# Altium PCB RF-learn-command-1relay-220V.PcbDoc
Units mm, origin at the board's own origin, x right, y up, seen from the top; angles counter-clockwise.
Board outline 72 x 47 mm, 2 copper layers (Top Layer, Bottom Layer); 41 components, 30 nets, 119 pads, 72 vias.
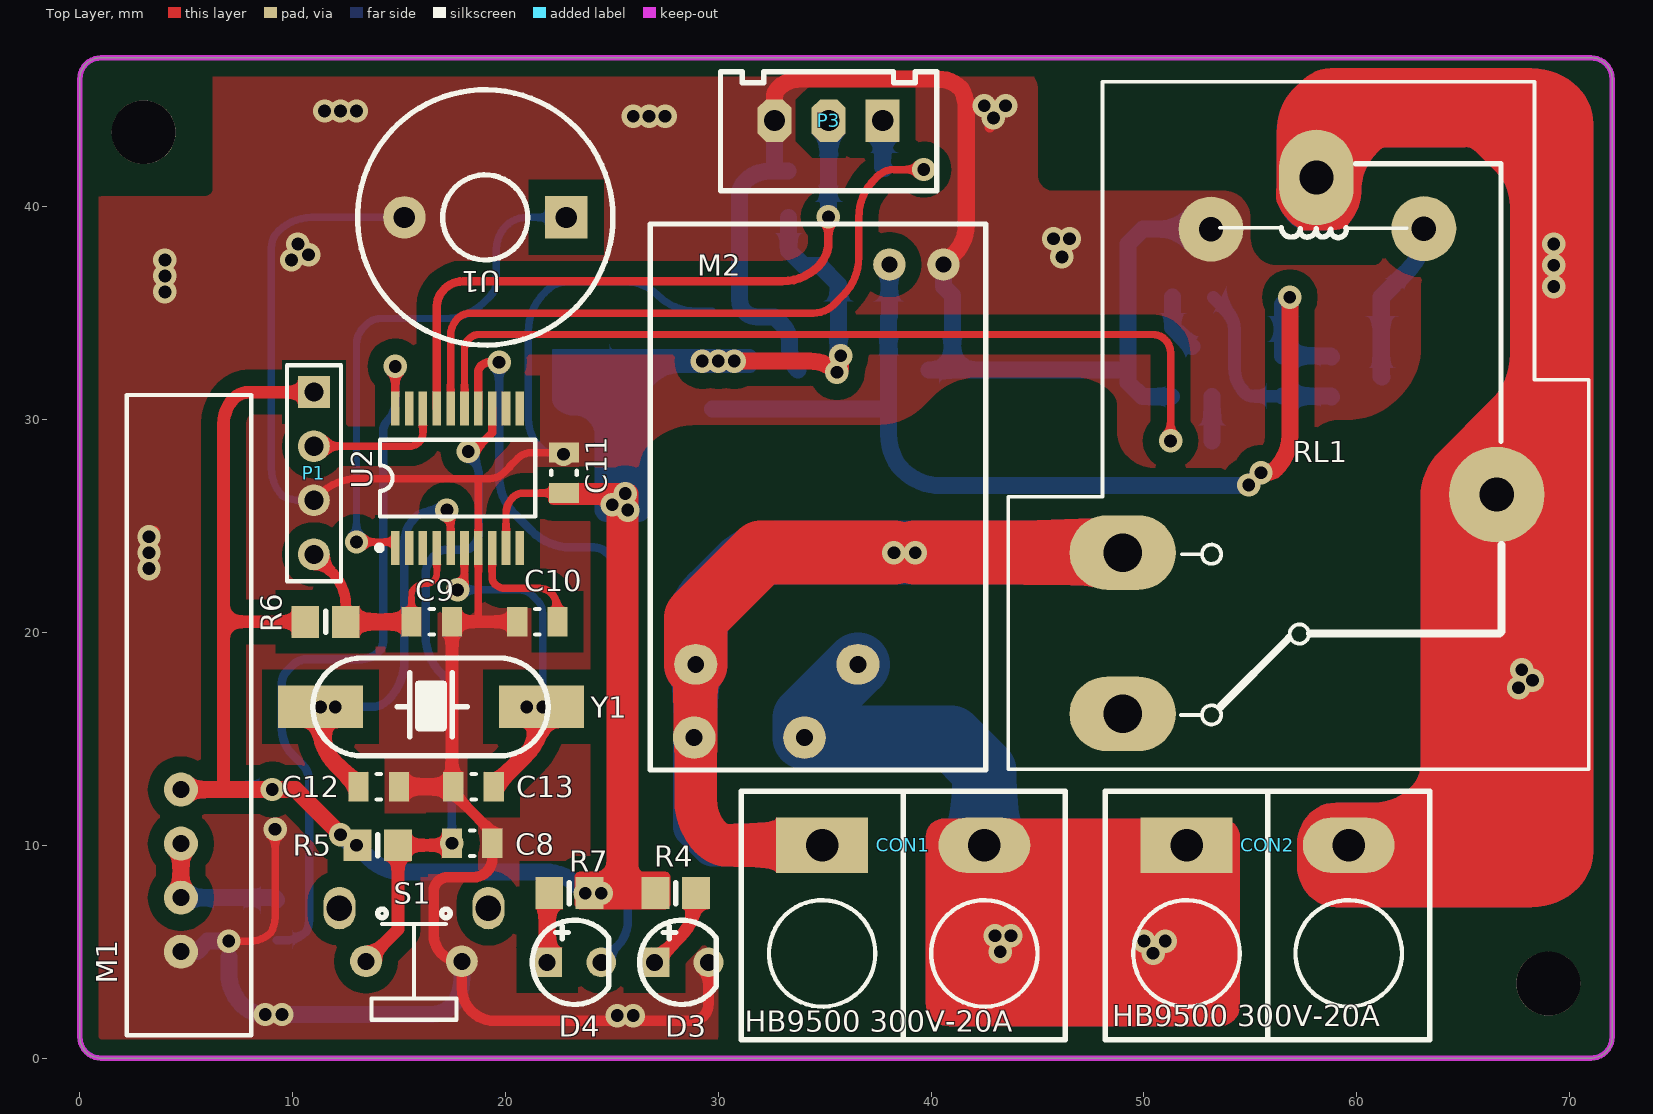
[diagram p0: Top Layer view]
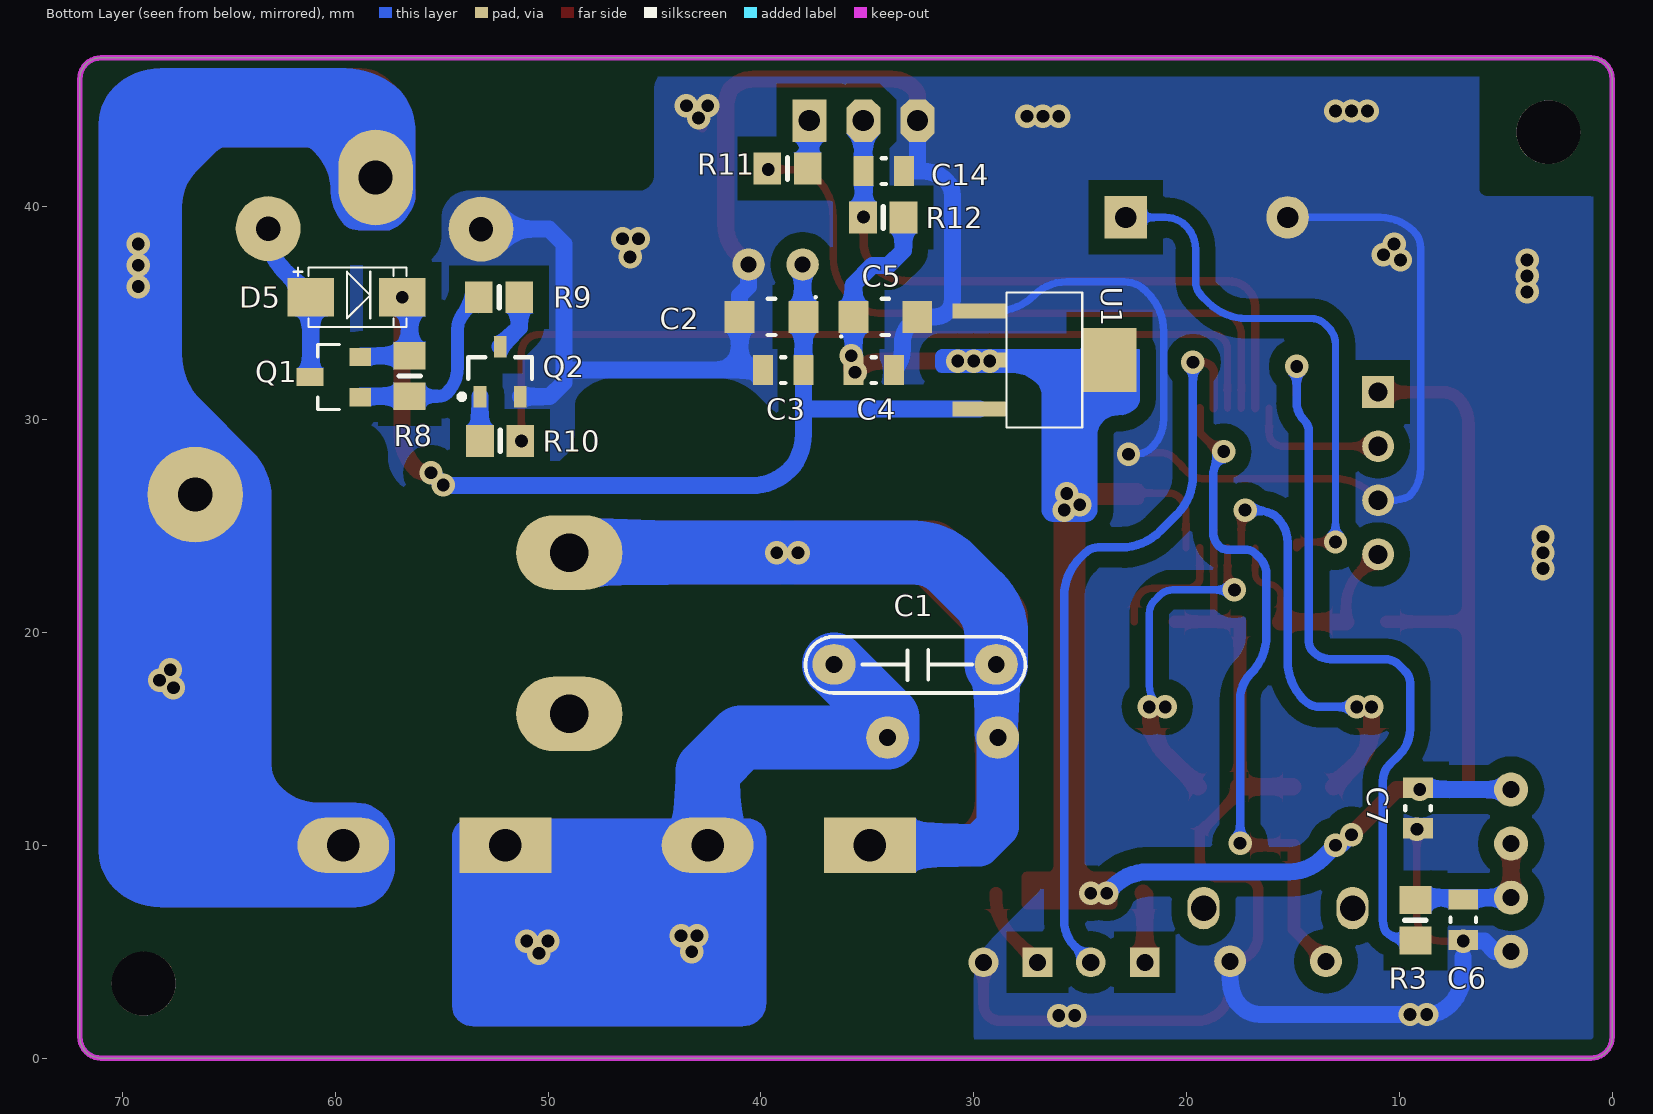
[diagram p1: Bottom Layer view, seen from below]
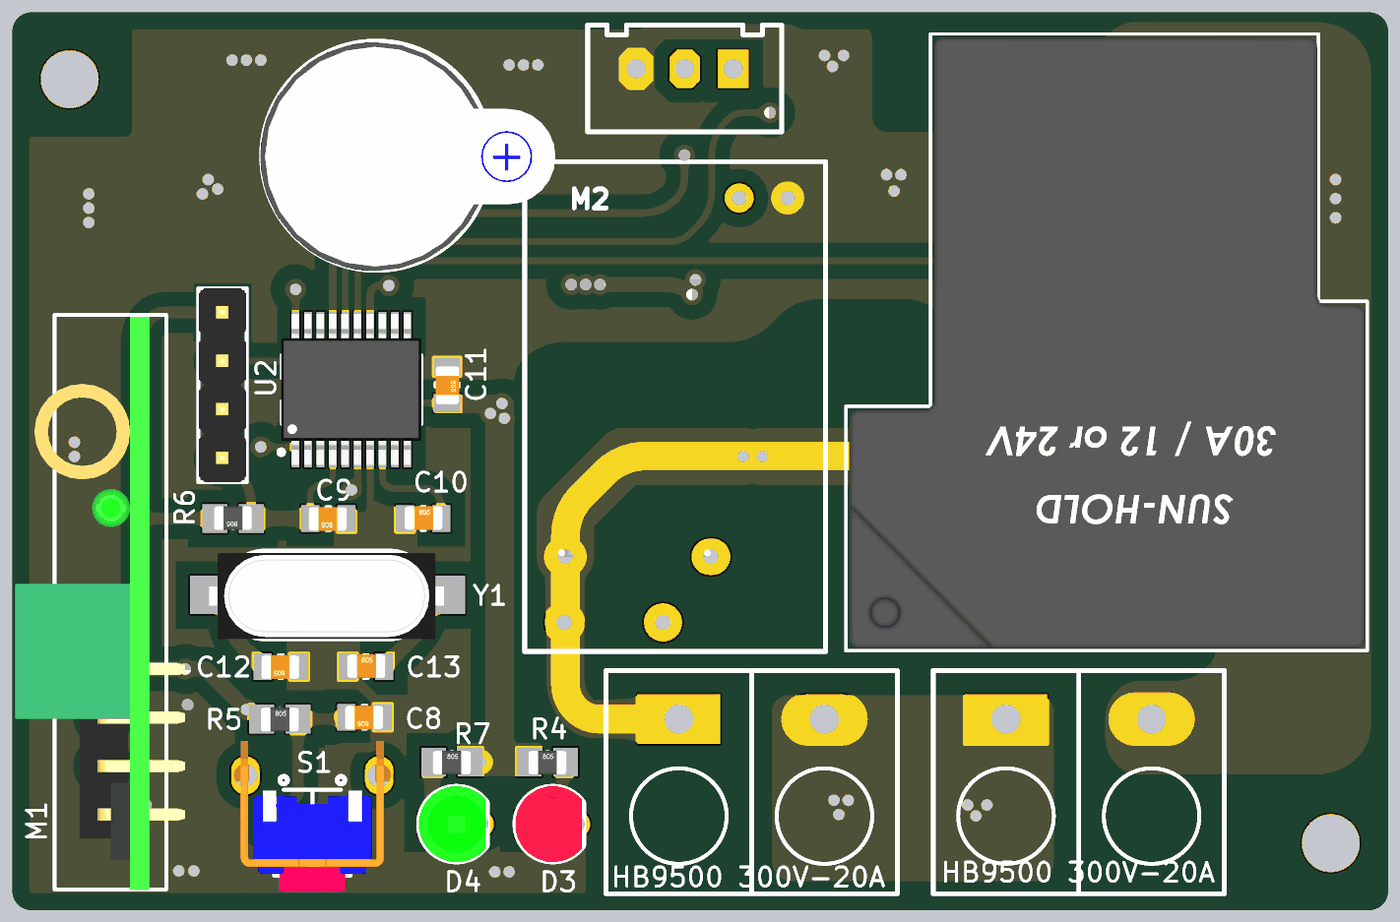
[diagram p2: 3D render of the assembled board from above, using the file's embedded part models]
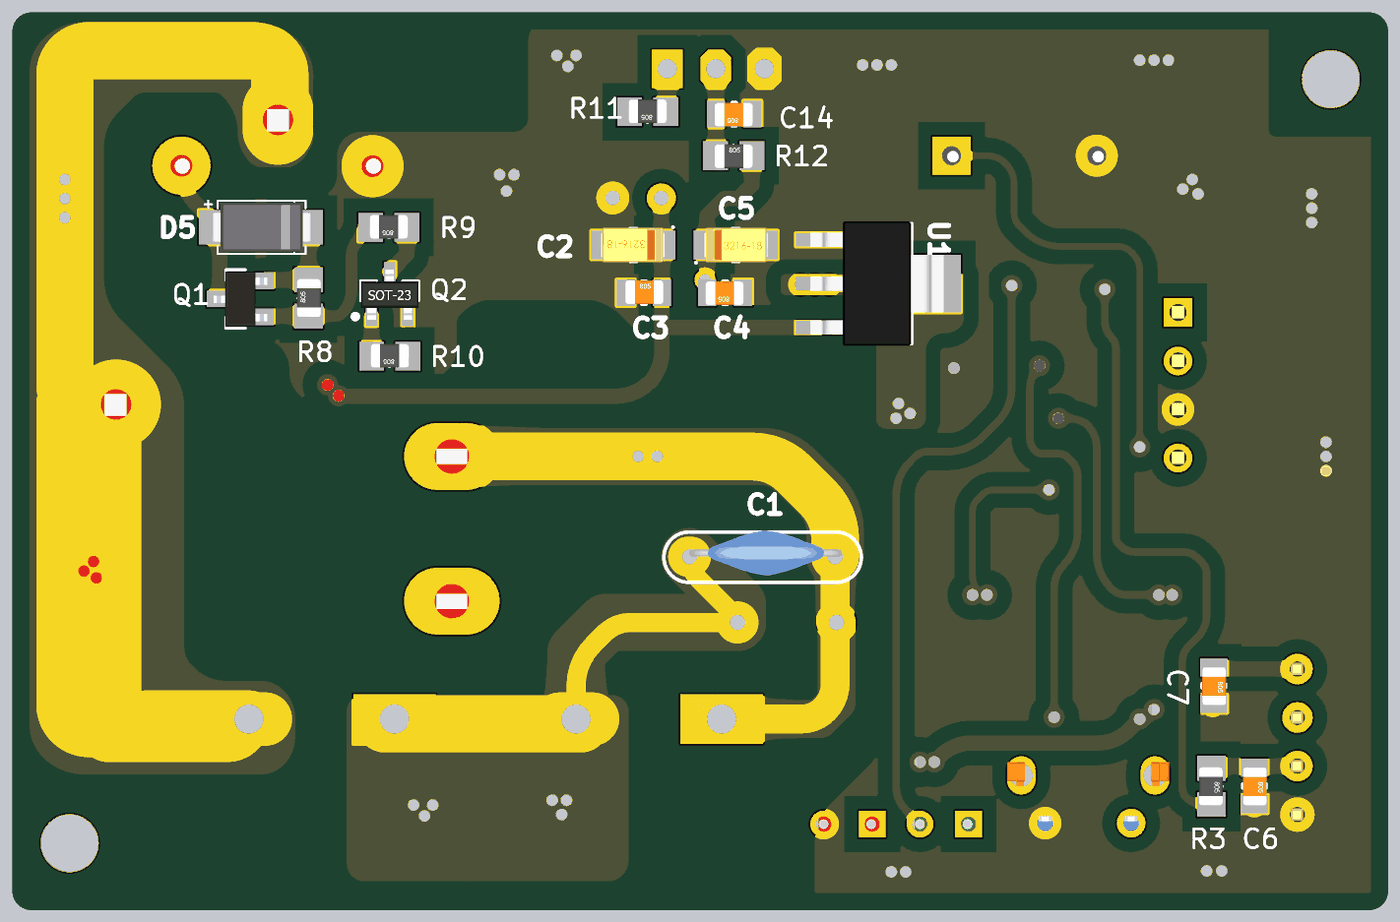
[diagram p3: 3D render of the assembled board from below, using the file's embedded part models]

## Layer stack, top to bottom
Top Solder: solder mask 0.0102, Solder Resist, Dk 3.5
Top Layer: signal copper 0.0356
Dielectric 1: dielectric 0.32, FR-4, Dk 4.8
Bottom Layer: signal copper 0.0356
Bottom Solder: solder mask 0.0102, Solder Resist, Dk 3.5

## Board outline
0,1 ccw(c1,1) 1,0 71,0 ccw(c71,1) 72,1 72,46 ccw(c71,46) 71,47 1,47 ccw(c1,46) 0,46

## Design rules (kind name [scope] priority, off if disabled: settings)
Clearance GND_L01_P001 [InPolygon] p1: gap=0.762
Clearance [All] p2: gap=0.2
PolygonConnect [All] p1: connectstyle=Direct reliefconductorwidth=0.254 reliefentries=4 polygonreliefangle="90 Angle" airgapwidth=0.254
RoomDefinition RF-learn-command-1relay-220V [InComponentClass('RF-learn-command-1relay-220V')] p1: confinementstyle=ConfineIn formatcopy=TRUE lockcomponents=FALSE outline 99,-32 375,-32 375,4 99,4
RoutingVias [All] p1: holewidth=0.6 width=1.1 viastyle="Through Hole" minholewidth=0.5 minwidth=1 maxholewidth=0.7 maxwidth=1.2
SolderMaskExpansion [All] p1: expansion=0.102
UnpouredPolygon [All] p1: allowshelved=TRUE
Width [All] p1: maxlimit=5 minlimit=0.254 preferedwidth=0.8
29 further rules are at their usual default settings.

## Components (designator, comment, footprint, x,y, rotation, side; value= is the part's Value field where it differs from the comment)
C1 "Cap1" C_Ceramic_KV 32.75,18.5 r180 bottom
C2 "10uF" "CAP TANTALUM 3216" 39.5,34.825 r0 bottom
C3 "100nF" "CM 0805" 38.95,32.325 r180 bottom
C4 "100nF" "CM 0805" 34.7,32.325 r0 bottom
C5 "10uF" "CAP TANTALUM 3216" 34.15,34.825 r180 bottom
C6 "33pF" "CM 0805" 7,6.5 r270 bottom
C7 "100n" "CM 0805" 9.127,11.75 r270 bottom
C8 "100nF" "CM 0805" 18.432,10.098 r180 top
C9 "100nF" "CM 0805" 16.537,20.5 r180 top
C10 "0.1uF" "CM 0805" 21.5,20.5 r0 top
C11 "100nF" "CM 0805" 22.75,27.5 r270 top
C12 "22p" "CM 0805" 14.05,12.75 r180 top
C13 "22p" "CM 0805" 18.5,12.75 r0 top
C14 "100nF" "CM 0805" 34.225,41.675 r0 bottom
CON1 "Terminal 2" domino-2pin-7.62 38.69,10 r0 top
CON2 "Terminal 2" domino-2pin-7.62 55.81,10 r0 top
D3 "RED LED" LED3mm-R 27,4.5 r0 top
D4 "RED LED" LED3mm-G 21.96,4.5 r0 top
D5 "SS14" "DO-214AC (SMA)" 60.25,36.25 r180 bottom
M1 "RF_315_RX" Module-RF-RX 4.75,12.62 r270 top
M2 "DRIVER_LED" LED_DRIVER12V 37.225,23.95 r90 top locked
P1 "Header 4" HDR1X4 11,31.29 r270 top
P3 "Header 3" HEADER_3_W 37.725,44.05 r180 top
Q1 "A1015" SC-43-BCE 60,32 r90 bottom
Q2 "C1815" 2SC1815 52.25,32.25 r90 bottom
R3 "4.7k" R0805 9.25,6.477 r270 bottom
R4 "1K" R0805 28,7.75 r0 top
R5 "10K" R0805 14,10 r0 top
R6 "10k" R0805 11.55,20.5 r180 top
R7 "1K" R0805 23,7.75 r0 top
R8 "4.7k" R0805 56.5,32.05 r90 bottom
R9 "4.7k" R0805 52.3,35.75 r0 bottom
R10 "2.2k" R0805 52.25,29 r0 bottom
R11 "1k" R0805 38.75,41.798 r0 bottom
R12 "10k" R0805 34.25,39.5 r180 bottom
RL1 "Relay SPDT, 10A, 12V" RL-SLA-24/12VDC-SL-C 58.1,41.375 r270 top locked
S1 "SW-SMD" "Button Tactile Switch" 15.7,5.8 r0 top
U1 "LM1117-3.3V" LM1117-SOP 28.455,32.8 r270 bottom
U1 "Buzzer" Buzzer 19.05,39.5 r180 top
U2 "STM8S003F3P6TR" SSOP-20 17.75,27.25 r0 top
Y1 "8MHz" HC49/US-SMD 16.5,16.5 r0 top

## Footprints (in the part's own frame and the unit in brackets; to place one, negate y for a bottom-side part, rotate by r counter-clockwise, add the part's x,y. Pads: shape width x height; smd on the part's side, far side on the other; paste and mask are expansions set on the pad)
2SC1815 [mm] "2SC1815 SMD"
  rect 1x0.6 smd: 1(-1.175,0.95) 2(-1.175,-0.95) 3(1.175,0)
  silkscreen extent -1.3,-1.5 0.67,1.93, body extent -1.34,-1.5 1.3,1.5, height 1.08
"Button Tactile Switch" [mm]
  oval 1.5x2 hole 1.2: 0(-3.5,1.25) 0(3.5,1.25)
  round 1.5 hole 0.8: 1(-2.25,-1.25) 2(2.25,-1.25)
  silkscreen extent -2,-4 2,1.2, body extent -4.25,-4.85 4.25,3.05, height 7.4
Buzzer [mm]
  rect 2x2 hole 1: 1(-3.8,0)
  round 2 hole 1: 2(3.8,0)
  silkscreen extent -6,-6 6,6, body extent -9.37,-5.95 6.08,6.05, height 9.65
C_Ceramic_KV [mil] "Ceramic capacitors"
  oval 80x75 hole 31: 1(-150,0) 2(150,0)
  silkscreen extent -203,-53 204,51, body extent -150,-39 165,55, height 356
"CAP TANTALUM 3216" [mm]
  rect 1.4x1.5 smd: 1(-1.5,0) 2(1.5,0)
  silkscreen extent -2.12,-0.97 0.18,0.85, body extent -1.67,-0.9 1.73,0.9, height 1.8
"CM 0805" [mm]
  rect 0.95x1.4 smd: 1(-0.95,0) 2(0.95,0)
  silkscreen extent -0.1,-0.6 0.1,0.6, body extent -0.97,-0.6 1.03,0.65, height 0.78
"DO-214AC (SMA)" [mm]
  rect 2.2x1.8 smd: 1(-0.899,-0.5) 2(3.397,-0.5)
  silkscreen extent -1.7,-1.9 3.6,0.9, body extent -1.3,-1.8 3.9,0.8, height 2.3
domino-2pin-7.62 [mil] "domino-2pin-7.62"
  rect 170x101.89 hole 60: 1(-150,0)
  oval 170x101.89 hole 60: 2(150,0)
  silkscreen extent -300,-360 300,100
HC49/US-SMD [mm] "HC-49/U SMD Low Profile XTAL"
  rect 4x2 smd: 1(-5.195,0) 2(5.195,0)
  silkscreen extent -5.55,-2.3 5.51,2.3, body extent -6.2,-2.3 6.1,2.2, height 5.18
HDR1X4 [mm] "Connector; Header; 4 Position"
  rect 1.5x1.5 hole 0.9: 1(0,0)
  round 1.5 hole 0.9: 2(2.54,0) 3(5.08,0) 4(7.62,0)
  silkscreen extent -1.27,-1.27 8.89,1.27, body extent -1.28,-1.25 8.88,1.24, height 8.54
HEADER_3_W [mm]
  rect 1.6x2 hole 1: 1(0,0)
  oct 1.6x2 hole 1: 2(2.54,0) 3(5.08,0)
  silkscreen extent -2.54,-2.29 7.62,3.3
LED3mm-G [mm]
  rect 1.4x1.4 hole 0.8: 1(0,0)
  round 1.4 hole 0.8: 2(2.54,0)
  silkscreen extent -0.7,-1.98 2.9,1.98, body extent -0.68,-1.99 2.8,1.99, height 5.2
LED3mm-R [mm]
  rect 1.4x1.4 hole 0.8: 1(0,0)
  round 1.4 hole 0.8: 2(2.54,0)
  silkscreen extent -0.7,-1.98 2.9,1.98, body extent -0.68,-1.99 2.8,1.99, height 5.2
LED_DRIVER12V [mil] "LED_Driver"
  round 78.74 hole 31.5: 1(-350,329) 2(-350,125)
  round 60 hole 30: 3(525,-132) 4(525,-32)
  silkscreen extent -410,-210 600,410
LM1117-SOP [mm]
  rect 0.7x2.54 smd: 1(-2.3,-1.27) 2(0,-1.27) 3(2.3,-1.27)
  rect 3x2.54 smd: 2(0,4.826)
  silkscreen extent -3.17,0 3.18,3.56, body extent -3.25,-1.78 3.25,5.18, height 1.68
Module-RF-RX [mm] "Module_RF_T"
  round 1.6 hole 0.8: 1(0,0) 2(2.54,0) 3(5.08,0) 4(7.62,0)
  silkscreen extent -18.54,-2.54 11.54,3.3, body extent -18.43,-4.59 11.57,4.29, height 17.5
R0805 [mm] "Chip Resistor; Body 2.0 x 1.2 mm (LxW typ)"
  rect 1.3x1.5 smd: 1(0.95,0) 2(-0.95,0)
  silkscreen extent 0,-0.5 0,0.5, body extent -1,-0.65 1,0.6, height 0.78
RL-SLA-24/12VDC-SL-C [mm] "Relay 12V30A 5C SLA-12VDC-SL-A"
  oval 4.5x3.5 hole 1.6: 1(0,0)
  round 4.5 hole 1.6: 1(14.9,8.475)
  oval 3.5x5 hole 1.8: 2(25.2,-9.1) 3(17.625,-9.1)
  round 3.048 hole 1.143: 4(2.425,-4.95) 5(2.4,5.05)
  silkscreen extent -4.5,-14.48 27.8,12.8, body extent -4.33,-14.3 27.68,12.7, height 20.2
SC-43-BCE [mil]
  rect 34x40 smd: B(-37.02,-46.5) E(37.02,-46.5)
  rect 34x50 smd: C(0.02,46.5)
  silkscreen extent -60,-8 60,33, body extent -57,-52 57,58, height 41
SSOP-20 [mm] "SSOP, Plastic; 20 Leads; Body Width 5.3 mm; Pitch 0.65 mm"
  rect 0.4x1.6 smd: 1(-2.925,-3.275) 2(-2.275,-3.275) 3(-1.625,-3.275) 4(-0.975,-3.275) 5(-0.325,-3.275) 6(0.325,-3.275) 7(0.975,-3.275) 8(1.625,-3.275) 9(2.275,-3.275) 10(2.925,-3.275) 11(2.925,3.275) 12(2.275,3.275) 13(1.625,3.275) 14(0.975,3.275) 15(0.325,3.275) 16(-0.325,3.275) 17(-0.975,3.275) 18(-1.625,3.275) 19(-2.275,3.275) 20(-2.925,3.275)
  silkscreen extent -3.8,-3.4 3.65,1.8, body extent -3.68,-3.94 3.65,3.96, height 1.98

## Part data
C1: "Polar Capacitor"
C2 C5: library part "CM Tantalum", "SMD Tantalum Capacitor"
C3 C4 C8 C9 C10 C11 C14: library part "CM Ceramic", "SMD Ceramic  Capacitor"
C6 C7: library part "Cap Semi", "Capacitor 100n 16V 0603"
C12 C13: library part "Cap Semi", "Capacitor (Semiconductor SIM Model)"
D3 D4: library part LED2, "LED SUPR RED CLR 0805 RT ANG SMD"
D5: library part Diode, "DIODE GEN PURPOSE 1000V 1A SMA"
M1: library part ModuleRF-RX
M2: library part LED_DRIVER12V
P1: "Header, 4-Pin"
P3: "Header, 3-Pin"
Q1: library part "PNP Transistor"
Q2: "NPN SMD Transistor"
R3 R6 R8 R9 R10 R11 R12: library part Res3, "Resistor"
R4 R5 R7: library part Res3, "Resistor 10k 0603"
RL1: library part "Relay 1", "Relay SPDT,10A - 12VDC 5 Pin"
S1: "Switch"
U1: library part LM1117, "800mA Low-Dropout Linear Regulator"
U2: library part STM8S003F3, "MCU"
Y1: library part XTAL, "Crystal Oscillator"

## Free pads (board coordinates)
  round 3 hole 3: 0(3,43.5) 0(69,3.5)

## Via types
v1: diameter 1.1, hole 0.6, Top Layer to Bottom Layer, tented both sides, 43 vias
v2: diameter 1.1, hole 0.6, Top Layer to Bottom Layer, tented top, 16 vias
v3: diameter 1.1, hole 0.6, Top Layer to Bottom Layer, tented bottom, 9 vias
v4: diameter 1.1, hole 0.6, Top Layer to Bottom Layer, 4 vias

## Nets (pads, with @x,y where several pads share a name; then routed paths per layer and width w, separated by ;. In a path a pad name is that pad's centre, name@x,y a point inside that pad or via, vN(x,y) a via of type N, cw(c..) or ccw(c..) an arc to the next point about the centre after c; other vN are vias at no path point)
5V: C4.2 C5.1 C7.1 C11.2 M1.1 P1.1 R4.2 R5.2 R6.1 R7.1 R12.1 U1.2@23.629,32.8 U1.2@29.725,32.8 U2.9 | length 110.1
  Top Layer w0.35: U2.9 20.025,25.565 cw(c21.135,25.565) 20.35,26.35 cw(c20.833,25.867) 20.833,26.55 C11.2
  Top Layer w0.6: 6.925,12.62 cw(c7.347,13.042) 6.75,13.042 6.75,20.5 ; R6.1 6.75,20.5 ; P1.1 7.95,31.29 ccw(c7.95,30.3) 7.25,31 ccw(c8.457,29.793) 6.75,29.793 6.75,20.5
  Top Layer w0.8: M1.1 6.925,12.62 v2(9.047,12.62) 10.13,12.62 v1(12.25,10.5) ; C11.2 v1@25.6,26.55 ; R7.1 v3(24.5,7.75) 25.5,7.75 ; v1(25.021,26) cw(c25.021,25.146) 25.625,25.75 v1(25.75,25.75) 25.75,8.177 25.625,8.052 cw(c25.198,8.052) 25.5,7.75 ; R4.2 25.5,7.75 ; v2(30,32.75) v2(30.75,32.75) 34.308,32.75 cw(c34.308,30.958) v2(35.575,32.225) 35.75,32.4 v2@35.75,32.753 ; v2@35.75,32.753 v2(35.75,33) ccw(c36.172,32.578) 35.575,32.578 v2@35.75,32.753
  Bottom Layer w0.8: M1.1 v2(9.047,12.62) C7.1 ; v1(12.25,10.5) 12.573,10.177 ccw(c13,10.604) v3(13,10) 13.596,9.404 ccw(c15.175,10.983) 15.175,8.75 21.8,8.75 cw(c21.8,6.456) 23.422,8.078 v3(23.75,7.75) v3(24.5,7.75) ; U1.2@23.629,32.8 U1.2@23.679,32.75 ; v1(25.625,26.525) 25.625,29.752 25.6,29.777 ccw(c23.06,29.777) 24.856,31.573 U1.2@23.679,32.75 ; v2(29.25,32.75) U1.2@23.679,32.75 ; R12.1 33.3,37.95 34,37.25 34.75,37.25 35.65,36.35 C5.1 C4.2@35.65,32.578
+12V: C2.1 C3.2 D5.2 M2.4 Q1.E R8.1 U1.3 | length 49.7
  Top Layer w0.8: v1(55.5,27.5) ccw(c55.5,29.311) 56.115,27.608 56.214,27.706 ccw(c54.67,29.25) 56.853,29.25 v4(56.853,35.75)
  Bottom Layer w0.8: U1.3 37.879,30.5 cw(c37.879,30.329) 38,30.45 ; M2.4 38.038,34.863 C2.1 C3.2 38,30.45 ; v1(54.927,26.927) 55.244,27.244 cw(c53.448,29.04) 54.814,26.899 40.446,26.899 cw(c40.446,29.439) 38.65,27.643 38.503,27.79 cw(c40.54,29.307) 38,29.307 38,30.45 ; v4(56.853,35.75) 56.5,35.397 R8.1 58.759,33 Q1.E
BUTTON: C14.2 P3.2 R12.2 U2.17 | length 30.6
  Top Layer w0.4: U2.17 16.775,35.325 cw(c17.861,35.325) 17.093,36.093 17.138,36.138 cw(c18.013,35.262) 18.013,36.5 33.01,36.5 ccw(c33.01,38.89) 34.7,37.2 ccw(c33.553,38.347) 35.175,38.347 v2(35.175,39.525)
  Bottom Layer w0.8: P3.2 35.185,41.685 C14.2 v2(35.175,39.525) R12.2
BUZZER: U1.1@22.85,39.5 U2.1 | length 25.1
  Top Layer w0.35: v1(13,24.25) 14.825,24.25 U2.1
  Bottom Layer w0.35: v1(13,24.25) 13,33.525 cw(c14.147,33.525) 13.335,34.335 13.475,34.475 cw(c14.139,33.811) 14.139,34.75 17.173,34.75 ccw(c17.173,37.29) 18.969,35.494 19.3,35.825 ccw(c18.636,36.489) 19.575,36.489 19.575,38.014 cw(c21.111,38.014) 20.025,39.1 cw(c20.991,38.134) 20.991,39.5 U1.1@22.85,39.5
DATA: R3.1 U2.20 | length 33.8
  Top Layer w0.4: U2.20@14.825,31.15 v1(14.825,32.5)
  Bottom Layer w0.4: R3.1 9.635,5.527 ccw(c9.635,6.939) 10.634,5.94 ccw(c9.689,6.475) 10.775,6.475 10.775,13.024 ccw(c9.686,13.024) 10.456,13.794 10,14.25 cw(c11.207,15.457) 9.5,15.457 9.5,17.65 cw(c10.224,17.65) 9.712,18.162 10.025,18.475 cw(c10.689,17.811) 10.689,18.75 13.25,18.75 ccw(c13.25,19.836) 14.018,19.068 14.075,19.125 ccw(c13.653,19.547) 14.25,19.547 14.25,29.432 cw(c15.018,29.432) 14.475,29.975 ; 14.475,29.975 ccw(c13.63,30.82) 14.825,30.82 v1(14.825,32.5)
GND: C2.2 C3.1 C4.1 C5.2 C6.2 C7.2 C8.1 C9.1 C10.1 C11.1 C12.1 C13.1 C14.1 D3.2 M1.4 M2.3 P1.3 P3.3 Q2.2 RL1.4 S1.2 U1.1@29.725,35.1 U1.2@15.25,39.5 U2.7 | length 196.1
  Top Layer w0.35: v2(7,5.5) 8.021,5.5 ccw(c8.021,6.838) 8.968,5.892 ccw(c7.805,6.62) 9.177,6.62 v2(9.177,10.75) ; P1.3 P1.3@11.283,26.493 ; P1.3@11.284,26.494 cw(c13.05,24.726) 13.05,27.225 18.725,27.225 ; 18.75,20.5 18.725,20.525 U2.7 18.725,27.225 ; 20.191,27.771 19.923,27.502 cw(c19.253,28.172) 19.253,27.225 18.725,27.225 ; 20.206,27.806 20.575,28.175 cw(c21.239,27.511) 21.239,28.45 C11.1@22.725,28.45
  Top Layer w0.5: v1(3.25,23) v1(3.25,23.75) v1(3.25,24.5) v1@3.5,24.75 ; v1(4,36) v1(4,36.75) v1(4,37.5) ; C13.1 17.55,12.45 19.382,10.618 C8.1 19.382,9.382 cw(c18.5,9.382) 18.5,8.5 17.3,8.5 ccw(c17.3,7.825) 16.625,7.825 16.625,5.8 ccw(c17.875,5.8) 17.428,4.633 ccw(c17.875,5.8) 17.875,4.55 S1.2 17.95,3.3 ccw(c19.5,3.3) 19.5,1.75 25.25,1.75 v1(25.25,2) v1(26,2) ; v1@26,1.75 28.75,1.75 ccw(c28.75,2.54) 29.54,2.54 D3.2 ; v1(42.5,44.75) v1(43.5,44.75) v1(42.927,44.177) ccw(c43.354,43.75) v1@42.75,43.75 ; v1(45.75,38.5) v1(46.5,38.5) cw(c45.293,38.5) v1(46.146,37.646)
  Top Layer w0.6: C13.1 17.487,12.813 C9.1 18.75,20.5 C10.1
  Top Layer w0.8: C12.1 C13.1 ; P3.3 32.645,45.164 cw(c33.202,45.164) 32.808,45.558 ; 32.809,45.559 cw(c33.875,44.491) 33.875,46 40.315,46 cw(c40.315,44.451) 41.41,45.546 cw(c39.675,44.603) 41.65,44.603 41.65,39.15 cw(c39.736,39.15) 41.089,37.797 M2.3
  Bottom Layer w0.35: C7.2 v2(9.177,10.75) ; P1.3 10.373,26.21 cw(c10.373,28.151) 9.547,26.394 cw(c10.869,27.715) 9,27.715 9,38.065 cw(c10.11,38.065) 9.325,38.85 cw(c10.894,37.281) 10.894,39.5 U1.2@15.25,39.5 ; v3(22.725,28.375) 22.41,28.375 cw(c22.41,29.485) 21.625,28.7 cw(c22.953,30.028) 21.075,30.028 21.075,34.148 cw(c23.615,34.148) 21.175,34.854 cw(c23.615,34.148) 21.819,35.944 21.943,36.068 cw(c22.925,35.086) 22.925,36.475 25.633,36.475 cw(c25.633,34.32) 27.156,35.844 ccw(c28.952,37.64) 28.952,35.1 U1.1@29.725,35.1
  Bottom Layer w0.5: v1(9.948,37.5) 10.146,37.5 ccw(c10.146,38.354) v1(10.75,37.75) v1(10.25,38.25) ; v1(11.5,44.5) v1(12.25,44.5) v1(13,44.5) ; v1(26,44.25) v1(26.75,44.25) v1(27.5,44.25)
  Bottom Layer w0.8: M1.4 5.5,5 6,5.5 v2(7,5.5) ; 7,4.75 7,4.009 ccw(c9.134,4.009) 7.625,2.5 ccw(c8.711,3.586) v1(8.711,2.05) v1(9.5,2.05) 16.553,2.05 ccw(c16.553,3.265) 17.412,2.406 17.654,2.648 ccw(c15.765,3.746) 17.95,3.746 S1.2 ; P3.3 32.645,41.675 ; C14.1 32.645,41.675 ; C4.1 cw(c34.716,33.291) 33.35,33.291 33.35,33.6 ccw(c32.083,33.6) 32.979,34.496 C5.2 31.829,34.825 cw(c31.829,35.679) 31.225,35.075 cw(c31.768,35.618) 31,35.618 31,40.542 cw(c31.948,40.542) 31.278,41.212 cw(c32.395,40.095) 32.395,41.675 32.645,41.675 ; C3.1 41,32.325 ; M2.3 40.578,36.25 41,35.828 C2.2 41,32.325 ; Q2.2 49.925,31.075 49.25,31.75 49.25,32.25 ; RL1.4 49.95,38.95 49.25,38.25 49.25,32.25 ; 41,32.325 49.175,32.325 49.25,32.25
L: C1.2 CON1.1 M2.1 RL1.3 | length 73.7
  Top Layer w2: C1.2 28.94,12.112 ccw(c31.48,12.112) 29.684,10.316 ccw(c30.447,11.079) 30.447,10 CON1.1
  Top Layer w3: C1.2 28.94,20.69 32,23.75 v4(38.25,23.75) ; v4(39.25,23.75) RL1.3
  Bottom Layer w2: C1.2 28.94,15.132 M2.1 28.868,10.882 29.75,10 CON1.1
  Bottom Layer w3: C1.2 28.94,19.888 cw(c31.48,19.888) 29.684,21.684 31.006,23.006 cw(c32.802,21.21) 32.802,23.75 v4(38.25,23.75) v4(39.25,23.75) RL1.3
LEARN: C8.2 R5.1 S1.1 U2.13 | length 31.8
  Top Layer w0.4: v1(18.25,28.5) 18.5,28.5 19.375,29.375 U2.13
  Top Layer w0.6: S1.1 14.95,6.05 R5.1 17.383,10 v3(17.482,10.098)
  Bottom Layer w0.4: v3(17.482,10.098) 17.482,16.852 ccw(c15.752,16.852) 16.975,18.075 cw(c18.725,19.825) 16.342,19.158 cw(c18.725,19.825) 16.25,19.825 16.25,22.724 cw(c17.395,22.724) 16.585,23.533 16.73,23.678 cw(c17.258,23.149) 17.258,23.897 18.105,23.897 ccw(c18.105,24.42) 18.475,24.05 ccw(c17.811,24.714) 18.75,24.714 18.75,27.293 ccw(c17.043,27.293) v1@18.251,28.499
N: C1.1 CON1.2 CON2.1 M2.2 | length 28.7
  Top Layer w3: v1(43,5.75) v1(43.75,5.75) 46.25,5.75 ; v1(43.25,5) 47,5 46.604,5.396 ; 46.25,6.25 ccw(c47.457,6.25) 46.5,5.514 ; v1(50,5.5) v1(51,5.5) v1(50.427,4.927) ccw(c50.854,4.5) v1@50.25,4.5 ; 46.25,5.75 46.5,5.5 ; 46.25,5.75 46.264,5.75 46.5,5.514 ; 46.5,5.5 46.603,5.397 ; 46.5,5.5 46.5,5.514 ; 46.5,5.514 ccw(c47.457,6.25) 46.603,5.397
  Bottom Layer w3: C1.1 34.05,15.99 M2.2 40.94,15.06 42.5,13.5 CON1.2
NetC6_1: C6.1 M1.2 M1.3 R3.2 | length 7.1
  Top Layer w0.8: M1.3 M1.2
  Bottom Layer w0.8: M1.3 9.137,7.54 R3.2
NetC10_2: C10.2 U2.8 | length 5.9
  Top Layer w0.35: U2.8 19.375,22.577 ccw(c19.802,22.577) 19.5,22.275 ccw(c19.983,22.758) 19.983,22.075 21.607,22.075 cw(c21.607,21.307) 22.15,21.85 ; 22.151,21.849 cw(c21.426,21.126) 22.45,21.126 C10.2
NetCON2_2: CON2.2 RL1.1 | length 5.3
  Top Layer w3: 66.75,17.75 cw(c66.75,16.543) v2(67.604,17.396) 67.957,17.75 v2(68.25,17.75) v2(67.75,18.25) ; 69,35.5 ccw(c68.396,36.104) 69.25,36.104 v2(69.25,36.25) v2(69.25,37.25) v2(69.25,38.25)
NetD3_1: D3.1 R4.1 | length 3.9
  Top Layer w0.6: D3.1 28.206,5.706 ccw(c26.41,7.502) 28.95,7.502 R4.1
NetD4_1: D4.1 R7.2 | length 3.3
  Top Layer w0.8: D4.1 21.96,7.66 R7.2
NetD4_2: D4.2 U2.14 | length 35.2
  Top Layer w0.4: U2.14 18.725,32.223 cw(c19.152,32.223) 18.85,32.525 cw(c19.272,32.103) 19.272,32.7 v1(19.7,32.7)
  Bottom Layer w0.4: v1(19.7,32.7) 19.7,27.352 ccw(c22.24,27.352) 20.444,25.556 21.256,24.744 ccw(c23.052,26.54) 23.052,24 24.146,24 cw(c24.146,23.146) 24.75,23.75 25.006,23.494 cw(c23.21,21.698) 25.75,21.698 25.75,6.457 cw(c24.043,6.457) 25.25,5.25 D4.2
NetD5_1: D5.1 Q1.C RL1.5 | length 7.7
  Bottom Layer w0.8: Q1.C 61.149,32.032 D5.1 62.406,37.007 ccw(c60.61,38.803) 63.15,38.803 RL1.5
NetP3_1: P3.1 R11.2 | length 2.3
  Bottom Layer w0.8: P3.1 37.725,41.873 R11.2
NetQ1_B: Q1.B R8.2 R9.1 | length 9.1
  Bottom Layer w0.6: R9.1 53.896,35.104 cw(c53.043,34.25) 54.25,34.25 54.25,32.457 ccw(c55.957,32.457) 54.75,31.25 ccw(c55.112,31.612) 55.112,31.1 R8.2
  Bottom Layer w0.8: R8.2 58.779,31.1 Q1.B
NetQ2_1: Q2.1 R10.1 | length 2.1
  Bottom Layer w0.8: R10.1 Q2.1
NetQ2_3: Q2.3 R9.2 | length 2.7
  Bottom Layer w0.8: R9.2 51.35,34.325 Q2.3
NRST: C9.2 P1.4 R6.2 U2.4 | length 11
  Top Layer w0.3: C9.2 15.587,21.776 cw(c15.974,21.776) 15.7,22.05 15.766,22.116 cw(c16.15,21.732) 16.15,22.275 16.263,22.275 ccw(c16.263,22.787) 16.625,22.425 ccw(c16.263,22.787) 16.775,22.787 U2.4
  Top Layer w0.5: P1.4 11.867,22.803 ; 11.867,22.803 cw(c10.339,21.275) 12.5,21.275 R6.2
  Top Layer w0.8: R6.2 C9.2
OSC_IN: C12.2 U2.5 Y1.1 | length 20.2
  Top Layer w0.35: v1(17.25,25.75) 17.425,25.575 U2.5
  Top Layer w0.8: v3(11.305,16.5) 11.305,15.597 ccw(c13.845,15.597) 12.049,13.801 C12.2
  Bottom Layer w0.4: v3(11.305,16.5) v3(12,16.5) 13.726,16.5 ccw(c13.726,17.524) 14.45,16.8 14.506,16.856 ccw(c12.71,18.652) 15.25,18.652 15.25,24.225 cw(c16.876,24.225) 15.726,25.375 15.848,25.496 cw(c16.813,23.787) 16.813,25.75 v1(17.25,25.75) v1@17.5,25.75
OSC_OUT: C13.2 U2.6 Y1.2 | length 15.9
  Top Layer w0.35: v1(17.75,22) 18.075,22.325 U2.6
  Top Layer w0.8: C13.2 20.951,14.251 ccw(c19.155,16.047) Y1.2@21.695,16.047
  Bottom Layer w0.35: v1(17.75,22) 20.646,22 cw(c20.646,21.146) 21.25,21.75 21.5,21.5 cw(c20.896,20.896) 21.75,20.896 21.75,17.5 cw(c20.543,17.5) v3@21.396,16.646 ; v3(21,16.5) v3(21.75,16.5)
RELAY: R10.2 U2.15 | length 41
  Top Layer w0.35: U2.15 18.075,33.328 cw(c18.672,33.328) 18.25,33.75 18.343,33.843 cw(c18.722,33.463) 18.722,34 50.396,34 cw(c50.396,33.146) 51,33.75 cw(c50.396,33.146) 51.25,33.146 v4(51.25,29)
RX: U2.3
SCL: U2.12
SDA: U2.11
STATUS: R11.1 U2.16 | length 31.1
  Top Layer w0.35: U2.16 17.425,33.965 cw(c18.535,33.965) 17.75,34.75 cw(c18.354,34.146) 18.354,35 34.459,35 ccw(c34.459,36.366) 35.425,35.4 35.856,35.831 ccw(c34.06,37.627) 36.6,37.627 36.6,39.498 cw(c39.14,39.498) 37.344,41.294 37.475,41.425 cw(c38.26,40.64) 38.26,41.75 v2(39.652,41.75)
  Bottom Layer w0.35: v2(39.652,41.75) R11.1
SWIM: P1.2 U2.18 | length 6.6
  Top Layer w0.35: P1.2 15.467,28.75 ccw(c15.467,29.433) 15.95,28.95 ; 15.95,28.95 ccw(c15.528,29.372) 16.125,29.372 U2.18
TX: U2.2
pads on no net: RL1.2 S1.0 U2.10 U2.19

## Polygon pours and split planes (outlines as drawn)
GND on Top Layer "TOP-GND" (solid, pour order 1): 0.5,0.75 cw(c1.104,1.354) 0.25,1.354 0.25,39.646 cw(c1.104,39.646) 0.5,40.25 cw(c1.104,39.646) 1.104,40.5 5.896,40.5 ccw(c5.896,40.854) 6.25,40.854 6.25,46.25 cw(c6.75,46.25) 6.75,46.75 43.73,46.75 cw(c43.73,45.48) 45,45.48 45,41.5 ccw(c45.75,41.5) 45.75,40.75 53.73,40.75 cw(c53.73,39.48) 55,39.48 55,38.52 ccw(c56.27,38.52) 56.27,37.25 60.75,37.25 ccw(c60.75,37.75) 61.25,37.75 61.25,39.48 cw(c62.52,39.48) 62.52,40.75 63.73,40.75 cw(c63.73,39.48) 65,39.48 65,38 cw(c64.5,38) 64.5,37.5 64.27,37.5 ccw(c64.27,36.23) 63,36.23 63,33.341 cw(c59.934,33.341) 62.102,31.173 61.827,30.898 cw(c59.659,33.066) 59.659,30 59.207,30 ccw(c59.207,28.293) 58,29.5 ccw(c59.207,28.293) 57.5,28.293 57.5,28.207 cw(c55.793,28.207) 57,27 cw(c56.396,27.604) 56.396,26.75 55.811,26.75 cw(c55.811,29.311) 54,27.5 ccw(c53.396,26.896) 53.396,27.75 50.457,27.75 cw(c50.457,29.457) 49.25,28.25 cw(c50.457,29.457) 48.75,29.457 48.75,30.646 ccw(c47.896,30.646) 48.5,31.25 ccw(c46.689,29.439) 46.689,32 42.27,32 ccw(c42.27,28.934) 40.102,31.102 39.648,30.648 cw(c37.48,32.816) 37.48,29.75 28.929,29.75 ccw(c28.929,26.684) 26.761,28.852 ccw(c27.993,27.619) 26.25,27.619 26.25,9.77 ccw(c29.316,9.77) 27.148,7.602 29.102,5.648 cw(c26.934,3.48) 30,3.48 30,1.104 cw(c29.146,1.104) 29.75,0.5 cw(c29.146,1.104) 29.146,0.25 1.707,0.25 cw(c1.707,1.957)
GND on Bottom Layer "BOT-GND" (solid, pour order 0): 0.5,0.75 cw(c1.104,1.354) 0.25,1.354 0.25,39.646 cw(c1.104,39.646) 0.5,40.25 cw(c1.104,39.646) 1.104,40.5 5.896,40.5 ccw(c5.896,40.854) 6.25,40.854 6.25,46.25 cw(c6.75,46.25) 6.75,46.75 43.73,46.75 cw(c43.73,45.48) 45,45.48 45,41.5 ccw(c45.75,41.5) 45.75,40.75 53.73,40.75 cw(c53.73,39.48) 55,39.48 55,38.52 ccw(c56.27,38.52) 56.27,37.25 60.75,37.25 ccw(c60.75,37.75) 61.25,37.75 61.25,39.48 cw(c62.52,39.48) 62.52,40.75 63.73,40.75 cw(c63.73,39.48) 65,39.48 65,38 cw(c64.5,38) 64.5,37.5 64.27,37.5 ccw(c64.27,36.23) 63,36.23 63,33.341 cw(c59.934,33.341) 62.102,31.173 61.827,30.898 cw(c59.659,33.066) 59.659,30 59.207,30 ccw(c59.207,28.293) 58,29.5 ccw(c59.207,28.293) 57.5,28.293 57.5,28.207 cw(c55.793,28.207) 57,27 cw(c56.396,27.604) 56.396,26.75 55.811,26.75 cw(c55.811,29.311) 54,27.5 ccw(c53.396,26.896) 53.396,27.75 50.457,27.75 cw(c50.457,29.457) 49.25,28.25 cw(c50.457,29.457) 48.75,29.457 48.75,30.646 ccw(c47.896,30.646) 48.5,31.25 ccw(c46.689,29.439) 46.689,32 42.27,32 ccw(c42.27,28.934) 40.102,31.102 39.648,30.648 cw(c37.48,32.816) 37.48,29.75 28.929,29.75 ccw(c28.929,26.684) 26.761,28.852 ccw(c27.993,27.619) 26.25,27.619 26.25,9.77 ccw(c29.316,9.77) 27.148,7.602 29.102,5.648 cw(c26.934,3.48) 30,3.48 30,1.104 cw(c29.146,1.104) 29.75,0.5 cw(c29.146,1.104) 29.146,0.25 1.707,0.25 cw(c1.707,1.957)

## Keep-outs
Keep-Out Layer:
  the board outline again, w0.254

## Other copper
Top Layer:
  region net N: 39.75,2.604 39.75,10.396 cw(c40.604,10.396) 40,11 cw(c40.604,10.396) 40.604,11.25 53.646,11.25 cw(c53.646,10.396) 54.25,11 cw(c53.646,10.396) 54.5,10.396 54.5,2.457 cw(c53.543,2.457) 53.543,1.5 40.854,1.5 cw(c40.854,2.604)
  region net NetCON2_2: 57.8,7.6 cw(c59.249,9.049) 57.2,9.049 57.2,10.051 cw(c59.248,10.051) 57.8,11.5 cw(c59.007,10.293) 59.007,12 60.8,12 ccw(c60.8,14.414) 62.507,12.707 62.6,12.8 ccw(c61.634,13.766) 63,13.766 63,26.33 cw(c66.066,26.33) 63.898,28.498 66.302,30.902 ccw(c64.134,33.07) 67.2,33.07 67.2,40.01 ccw(c64.81,40.01) 66.5,41.7 65.612,42.588 ccw(c65.1,42.076) 65.1,42.8 61.341,42.8 ccw(c61.341,42.459) 61.1,42.7 60.978,42.578 ccw(c62.855,40.7) 60.2,40.7 cw(c58.028,40.7) 59.564,39.164 cw(c58.927,39.8) 58.927,38.9 57.449,38.9 cw(c58.479,41.022) 56.25,40.25 cw(c58.02,40.602) 56.25,40.954 cw(c56.994,41.102) 56.25,41.25 56.25,43.5 cw(c59.517,43.497) 56.5,44.75 cw(c58.635,43.868) 57,45.5 57.5,46 cw(c58.838,44.476) 58.97,46.5 68.23,46.5 cw(c68.23,43.435) 70.398,45.602 cw(c68.704,43.908) 71.1,43.907 71.1,9.693 cw(c68.704,9.692) 70.398,7.998 cw(c68.23,10.166) 68.23,7.1 59.007,7.1 cw(c59.007,8.807)
  region net 5V: 23.25,7.25 ccw(c23.5,7.25) 23.5,7 27.5,7 ccw(c27.5,7.25) 27.75,7.25 27.75,8.5 ccw(c27.5,8.5) 27.5,8.75 26.5,8.75 cw(c26.5,9) 26.25,9 26.25,26.5 ccw(c25.75,26.5) 25.75,27 22.25,27 ccw(c22.25,26.75) 22,26.75 22,26.25 ccw(c22.25,26.25) 22.25,26 24.25,26 cw(c24.25,25.5) 24.75,25.5 24.75,9.25 cw(c24.25,9.25) 24.25,8.75 23.5,8.75 ccw(c23.5,8.5) 23.25,8.5
Bottom Layer:
  region net N: 39.75,2.604 39.75,10.396 cw(c40.604,10.396) 40,11 cw(c40.604,10.396) 40.604,11.25 53.646,11.25 cw(c53.646,10.396) 54.25,11 cw(c53.646,10.396) 54.5,10.396 54.5,2.457 cw(c53.543,2.457) 53.543,1.5 40.854,1.5 cw(c40.854,2.604)
  region net NetCON2_2: 57.8,7.6 cw(c59.249,9.049) 57.2,9.049 57.2,10.051 cw(c59.248,10.051) 57.8,11.5 cw(c59.007,10.293) 59.007,12 60.8,12 ccw(c60.8,14.414) 62.507,12.707 62.6,12.8 ccw(c61.634,13.766) 63,13.766 63,26.33 cw(c66.066,26.33) 63.898,28.498 66.302,30.902 ccw(c64.134,33.07) 67.2,33.07 67.2,40.01 ccw(c64.81,40.01) 66.5,41.7 65.612,42.588 ccw(c65.1,42.076) 65.1,42.8 61.341,42.8 ccw(c61.341,42.459) 61.1,42.7 60.978,42.578 ccw(c62.856,40.7) 60.2,40.7 cw(c58.027,40.7) 59.564,39.164 cw(c58.927,39.8) 58.927,38.9 57.449,38.9 cw(c58,40.47) 56.5,39.75 cw(c57.522,40.527) 56.25,40.7 56.25,43.5 cw(c58.957,43.629) 56.952,45.452 cw(c59.482,42.922) 59.482,46.5 68.23,46.5 cw(c68.23,43.434) 70.398,45.602 cw(c68.704,43.907) 71.1,43.907 71.1,9.693 cw(c68.704,9.693) 70.398,7.998 cw(c68.23,10.166) 68.23,7.1 59.007,7.1 cw(c59.007,8.807)
  region net 5V: 23.25,30.2 cw(c23.25,29.25) 24.2,29.25 24.2,25.75 ccw(c24.75,25.75) 24.75,25.2 26.25,25.2 ccw(c26.25,25.75) 26.8,25.75 26.8,31.146 cw(c27.604,31.146) 27.036,31.714 cw(c28.207,30.543) 28.207,32.2 31.5,32.2 ccw(c31.5,32.5) 31.8,32.5 31.8,33 ccw(c31.5,33) 31.5,33.3 22.25,33.3 ccw(c22.25,33.25) 22.2,33.25 22.2,31 ccw(c22.854,31) 22.391,30.538 ccw(c23.207,31.354) 23.207,30.2

## Silkscreen, mask and mechanical layers (free items; w line width, h text height)
Top Solder:
  lines w1: 34.396,10.25 cw(c34.396,9.396) 35,10
  lines w1.5: 34.88,10 30.707,10 cw(c30.707,11.707) 29.5,10.5 cw(c30.852,11.852) 28.94,11.852 28.94,18.5 28.94,19.57 cw(c32.006,19.57) 29.838,21.738 30.977,22.877 cw(c33.145,20.709) 33.145,23.775 48.667,23.775 cw(c48.667,23.092) 49.15,23.575
  lines w2: 51.523,10 ccw(c51.523,10.427) 51.825,10.125
Bottom Solder:
  lines w1: 36.56,18.5 cw(c34.894,18.5) 36.072,17.322 34.22,15.47 ccw(c34.629,15.06) 34.05,15.06 39.648,15.06 cw(c39.648,13.148) 41,14.5 41.602,13.898 cw(c39.434,11.73) 42.5,11.73 42.5,10
  lines w1.5: 28.94,18.5 28.94,11.852 ccw(c30.852,11.852) 29.5,10.5 ccw(c30.707,11.707) 30.707,10 34.146,10 ccw(c34.146,10.854) 34.75,10.25 ; 34.648,9.925 cw(c34.648,9.498) 34.95,9.8
  lines w2: 42.5,10 51.428,10 cw(c51.428,9.403) 51.85,9.825
  lines w2.5: 28.94,18.5 28.94,19.42 cw(c32.006,19.42) 29.838,21.588 31.102,22.852 cw(c33.27,20.684) 33.27,23.75 49,23.75
  lines w3: 42.25,9.75 52.5,9.75 ; 57.75,41.25 ccw(c57.75,41.5) 58,41.5 58,43.73 cw(c59.27,43.73) 59.27,45 67.98,45 cw(c67.98,43.73) 69.25,43.73 69.25,27.52 cw(c67.98,27.52) 67.98,26.25 66.75,26.25 66.75,11.27 cw(c65.48,11.27) 65.48,10 ; 59.62,10 65,10 ; 60,10 ccw(c60.75,10) 60.75,9.25 67,9.25 ; 67.98,9.5 ccw(c67.98,10.77) 69.25,10.77 69.25,26.5
Mechanical 1:
  lines w0.1: 0.25,1.354 ccw(c1.104,1.354) 0.5,0.75 ccw(c1.707,1.957) 1.707,0.25 29.146,0.25 ccw(c29.146,1.104) 29.75,0.5 ccw(c29.146,1.104) 30,1.104 30,3.48 ccw(c26.934,3.48) 29.102,5.648 27.148,7.602 cw(c29.316,9.77) 26.25,9.77 26.25,27.619 cw(c27.993,27.619) 26.761,28.852 cw(c28.929,26.684) 28.929,29.75 37.48,29.75 ccw(c37.48,32.816) 39.648,30.648 40.102,31.102 cw(c42.27,28.934) 42.27,32 46.689,32 cw(c46.689,29.439) 48.5,31.25 cw(c47.896,30.646) 48.75,30.646 48.75,29.457 ccw(c50.457,29.457) 49.25,28.25 ccw(c50.457,29.457) 50.457,27.75 53.396,27.75 cw(c53.396,26.896) 54,27.5 ccw(c55.811,29.311) 55.811,26.75 56.396,26.75 ccw(c56.396,27.604) 57,27 ccw(c55.793,28.207) 57.5,28.207 57.5,28.293 cw(c59.207,28.293) 58,29.5 cw(c59.207,28.293) 59.207,30 59.659,30 ccw(c59.659,33.066) 61.827,30.898 62.102,31.173 ccw(c59.934,33.341) 63,33.341 63,36.23 cw(c64.27,36.23) 64.27,37.5 64.5,37.5 ccw(c64.5,38) 65,38 65,39.48 ccw(c63.73,39.48) 63.73,40.75 62.52,40.75 ccw(c62.52,39.48) 61.25,39.48 61.25,37.75 cw(c60.75,37.75) 60.75,37.25 56.27,37.25 cw(c56.27,38.52) 55,38.52 55,39.48 ccw(c53.73,39.48) 53.73,40.75 45.75,40.75 cw(c45.75,41.5) 45,41.5 45,45.48 ccw(c43.73,45.48) 43.73,46.75 6.75,46.75 ccw(c6.75,46.25) 6.25,46.25 6.25,40.854 cw(c5.896,40.854) 5.896,40.5 1.104,40.5 ccw(c1.104,39.646) 0.5,40.25 ccw(c1.104,39.646) 0.25,39.646 0.25,1.354 ; 22,26.25 ccw(c22.25,26.25) 22.25,26 24.25,26 cw(c24.25,25.5) 24.75,25.5 24.75,9.5 24.75,9.25 cw(c24.25,9.25) 24.25,8.75 24,8.75 23.5,8.75 ccw(c23.5,8.5) 23.25,8.5 23.25,7.25 ccw(c23.5,7.25) 23.5,7 27.5,7 ccw(c27.5,7.25) 27.75,7.25 27.75,8.25 27.75,8.5 ccw(c27.5,8.5) 27.5,8.75 27.25,8.75 26.5,8.75 cw(c26.5,9) 26.25,9 26.25,26.5 ccw(c25.75,26.5) 25.75,27 22.25,27 ccw(c22.25,26.75) 22,26.75 22,26.25
  lines w0.254: 0,41 0,2 0,1 ccw(c1,1) 1,0 2,0 66,0 ; 0,41 0,46 cw(c1,46) 1,47 6,47 ; 0,41 6,41 6,47 ; 6,47 68,47 71,47 cw(c71,46) 72,46 72,43 72,6 ; 66,0 71,0 ccw(c71,1) 72,1 72,6 ; 66,0 66,6 72,6
Mechanical 13:
  lines w0.1: 25.604,25.25 25.646,25.25 ; 25.646,25.25 24.75,25.25 cw(c24.75,25.75) 24.25,25.75 24.25,26.25 24.25,29.25 ccw(c23.25,29.25) 23.25,30.25 23.207,30.25 cw(c23.207,31.354) 22.427,30.573 cw(c22.854,31) 22.25,31 22.25,33.25 31.25,33.25 31.5,33.25 cw(c31.5,33) 31.75,33 31.75,32.896 31.75,32.5 cw(c31.5,32.5) 31.5,32.25 31.25,32.25 28.207,32.25 ccw(c28.207,30.543) 27,31.75 ccw(c27.604,31.146) 26.75,31.146 26.75,26.707 26.75,25.75 cw(c26.25,25.75) 26.25,25.25 25.646,25.25 ; 39.75,2.604 ccw(c40.854,2.604) 40.854,1.5 41.207,1.5 51.939,1.5 53.543,1.5 ccw(c53.543,2.457) 54.5,2.457 54.5,2.5 54.5,4.061 54.5,10.396 ccw(c53.646,10.396) 54.25,11 ccw(c53.646,10.396) 53.646,11.25 41,11.25 40.604,11.25 ccw(c40.604,10.396) 40,11 ccw(c40.604,10.396) 39.75,10.396 39.75,9.793 39.75,2.604

## Text inside footprints (layer, text, board x,y; h text height)
CON1: Top Overlay "HB9500 300V-20A" at 31.25,1.25 h1
CON2: Top Overlay "HB9500 300V-20A" at 48.5,1.5 h1